# Altium PCB Intelligent_Agriculture.PcbDoc
Units mil, origin at the board's own origin, x right, y up, seen from the top; angles counter-clockwise.
Board outline 3925 x 3925 mil, 2 copper layers (Top Layer, Bottom Layer); 87 components, 58 nets, 325 pads, 59 vias.
Unrouted connection lines stored in the file: 3.
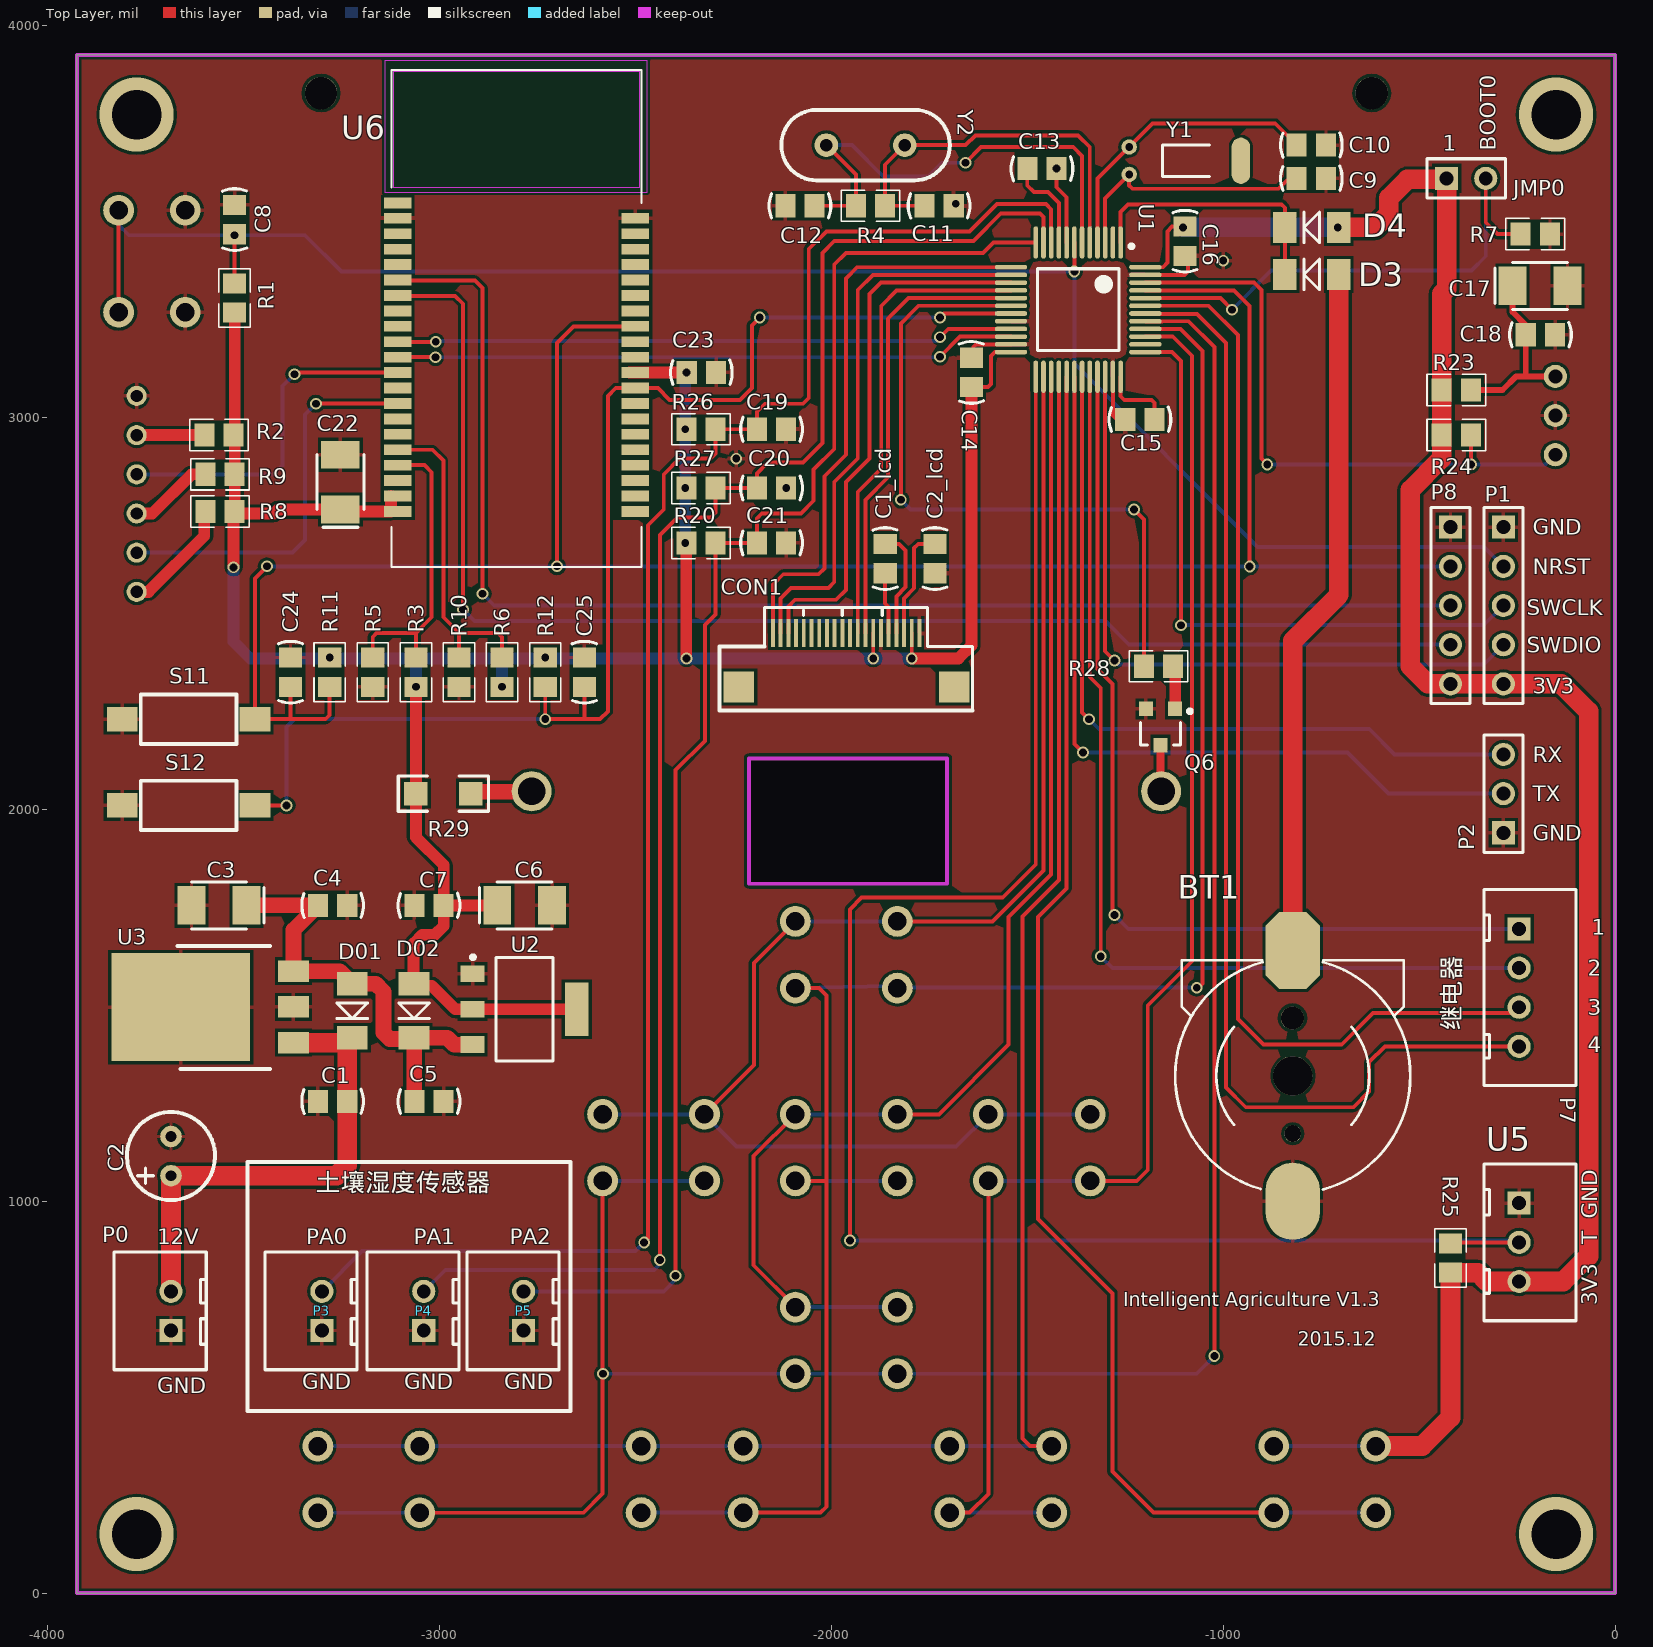
[diagram p0: Top Layer view]
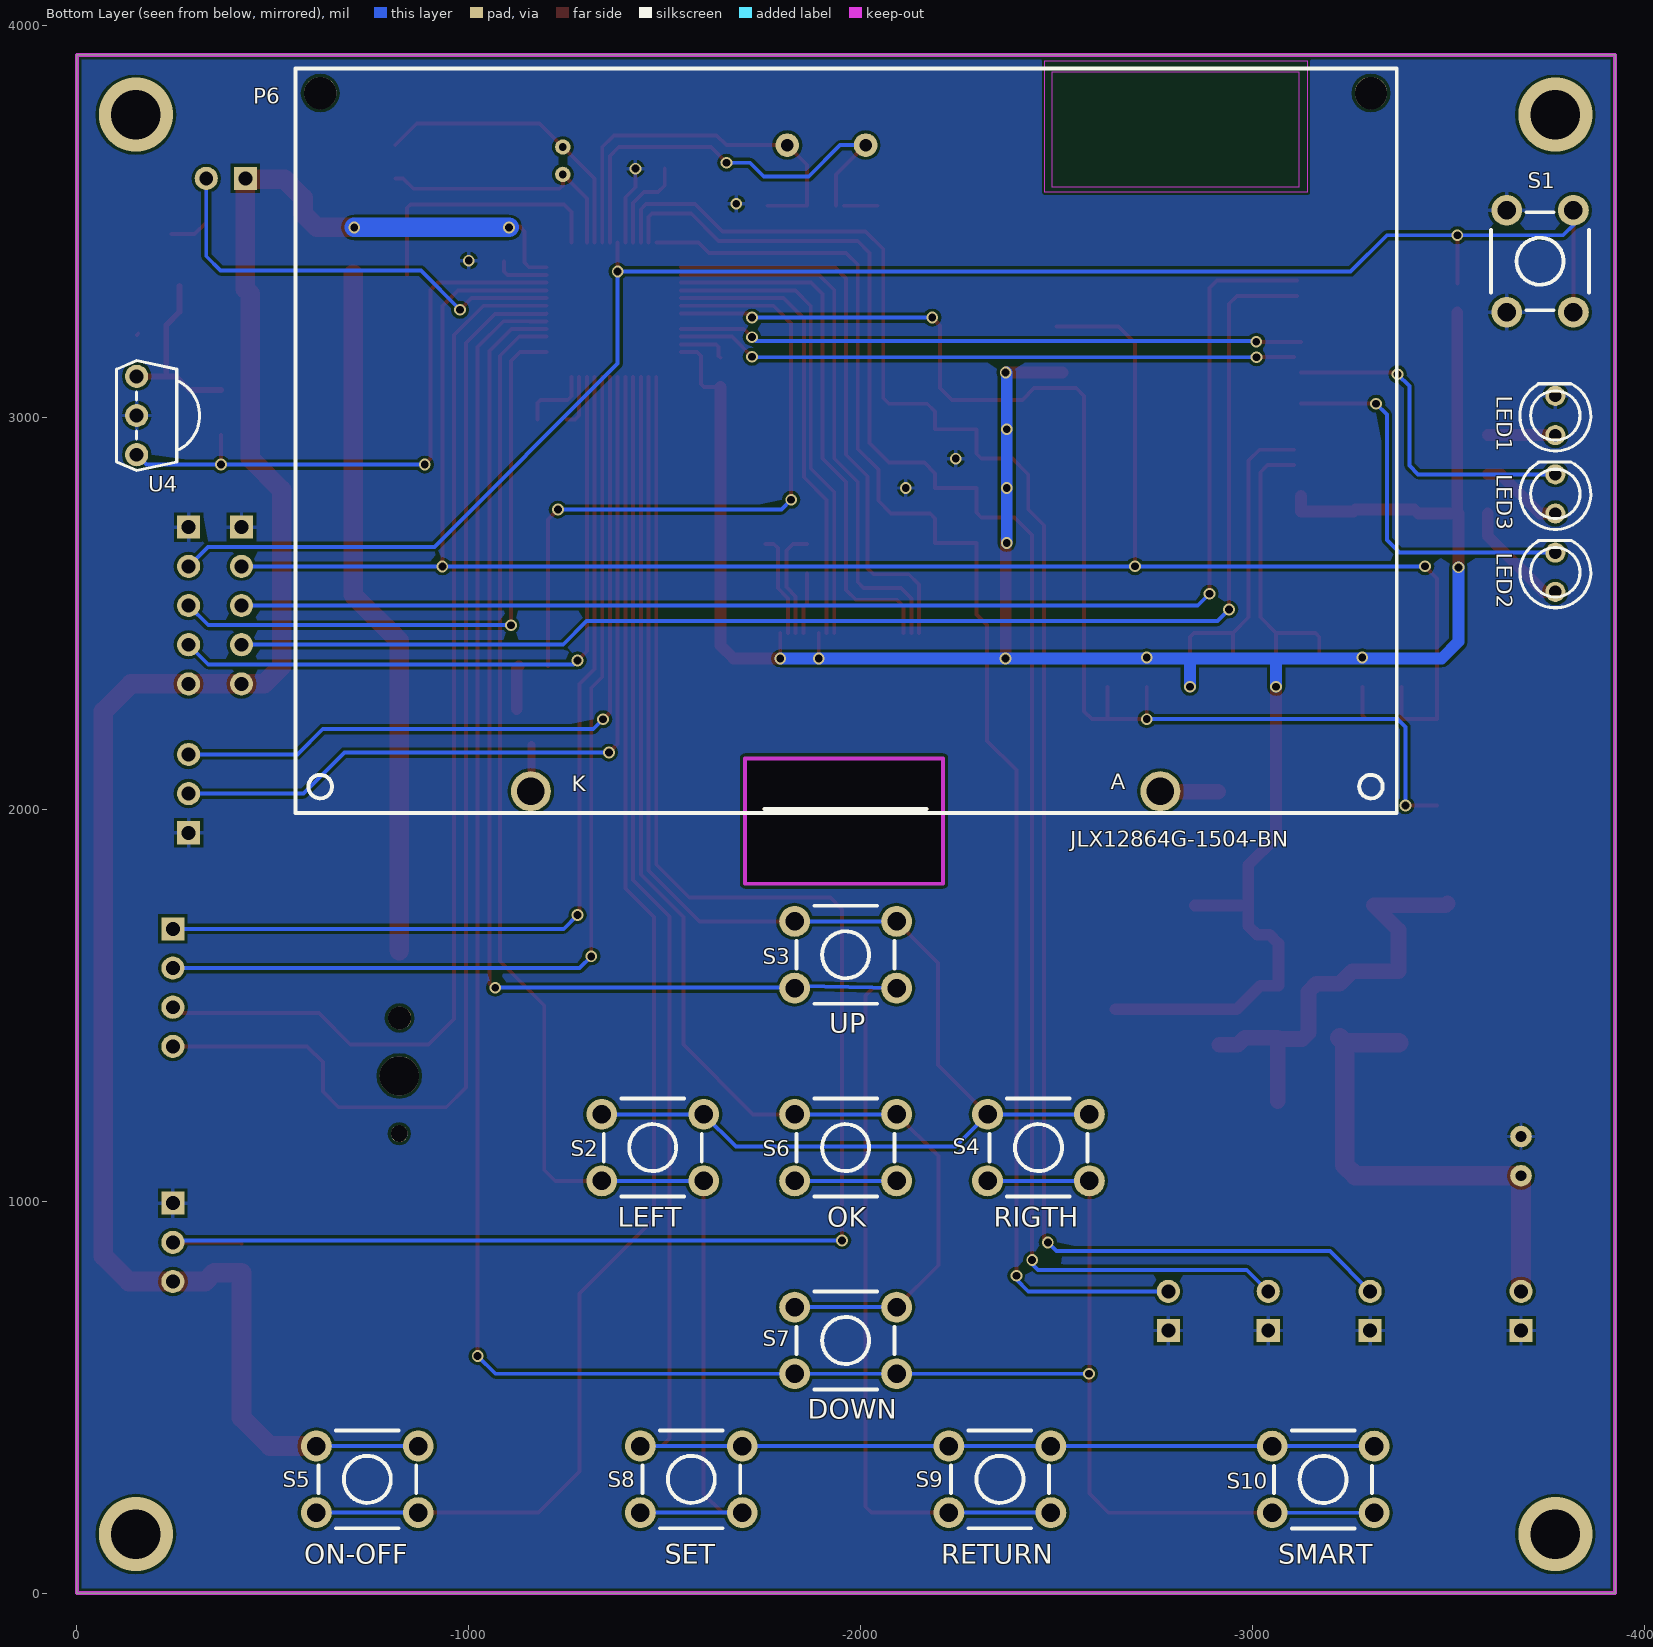
[diagram p1: Bottom Layer view, seen from below]

## Layer stack, top to bottom
Top Layer: signal copper 1.4
Dielectric: dielectric 12.6, FR-4, Dk 4.8
Bottom Layer: signal copper 1.4

## Board outline
-3925,0 -3925,3925 0,3925 0,0
cut-out: -1705,2130 -2210,2130 -2210,1810 -1705,1810

## Design rules (kind name [scope] priority, off if disabled: settings)
Clearance [All] p1: gap=7.5
HoleSize [All] p1: absolutevalues=TRUE maxlimit=200 minlimit=1 maxpercent=80.000 minpercent=20.000
PolygonConnect [All] p1: connectstyle=Relief reliefconductorwidth=10 reliefentries=4 polygonreliefangle="90 Angle"
RoutingVias [All] p1: holewidth=28 width=50 viastyle="Through Hole" minholewidth=28 minwidth=50 maxholewidth=28 maxwidth=50
SMDNeckDown [All] p1: percent=120.000
SilkscreenOverComponentPads SilkToSolderMaskClearance [IsPad] p1: minsilkscreentomaskgap=10
SolderMaskExpansion [All] p1: expansion=4
Width [All] p1: maxlimit=50 minlimit=8 preferedwidth=20
26 further rules are at their usual default settings.

## Classes and differential pairs
component class U_Intelligent_Agriculture: BT1 C1 C1_lcd C2 C2_lcd C3 C4 C5 C6 C7 C8 C9 C10 C11 C12 C13 C14 C15 C16 C17 C18 C19 C20 C21 CON1 D01 D02 D3 D4 JMP0 LED1 P0 P1 P2 P3 P4 P5 P6 P7 Q6 R1 R2 R4 R7 R20 R23 R24 R25 R26 R27 R28 R29 S1 S2 S3 S4 S5 S6 S7 S8 S9 S10 U1 U2 U3 U4 U5 Y1 Y2
component class U_Intelligent_Agriculture_Wifi: C22 C23 C24 C25 LED2 LED3 P8 R3 R5 R6 R8 R9 R10 R11 R12 S11 S12 U6

## Components (designator, comment, footprint, x,y, rotation, side; value= is the part's Value field where it differs from the comment)
BT1 "Battery" CR1220 -822.52,1319.8 r180 top
C1 "Cap" C-RAD-0805 -3272.52,1254.8 r180 top
C1_lcd "Cap" C-RAD-0805 -1862.52,2639.8 r90 top
C2 "Cap Pol1" C-RB-2.54 -3685,1115 r90 top
C2_lcd "Cap" C-RAD-0805 -1735.52,2639.8 r270 top
C3 "Cap Pol" CAP-3528 -3562.52,1754.8 r180 top
C4 "Cap" C-RAD-0805 -3272.52,1754.8 r0 top
C5 "Cap" C-RAD-0805 -3026.55,1254.8 r0 top
C6 "Cap Pol" CAP-3528 -2782.52,1754.8 r0 top
C7 "Cap" C-RAD-0805 -3026.55,1754.8 r180 top
C8 "Cap" C-RAD-0805 -3522.52,3504.8 r270 top
C9 "Cap" C-RAD-0805 -775,3610 r0 top
C10 "Cap" C-RAD-0805 -775,3695 r0 top
C11 "Cap" C-RAD-0805 -1725,3540 r0 top
C12 "Cap" C-RAD-0805 -2080,3540 r180 top
C13 "Cap" C-RAD-0805 -1462.52,3634.8 r0 top
C14 "Cap" C-RAD-0805 -1642.52,3114.8 r90 top
C15 "Cap" C-RAD-0805 -1212.52,2994.8 r180 top
C16 "Cap" C-RAD-0805 -1097.52,3449.8 r270 top
C17 "Cap Pol" CAP-3528 -191.52,3335.8 r0 top
C18 "Cap" C-RAD-0805 -190.52,3210.8 r0 top
C19 "Cap" C-RAD-0805 -2152.52,2969.8 r180 top
C20 "Cap" C-RAD-0805 -2152.52,2819.8 r180 top
C21 "Cap" C-RAD-0805 -2152.52,2679.8 r180 top
C22 "Cap Pol" CAP-3528 -3252.52,2834.8 r90 top
C23 "Cap" C-RAD-0805 -2331.52,3114.8 r180 top
C24 "Cap" C-RAD-0805 -3380,2350 r90 top
C25 "Cap" C-RAD-0805 -2630,2350 r90 top
CON1 "LCD_CON20" FPC0.5-20P-A -2200,2380 r180 top
D01 "Diode" DIODE-1206 -3222.52,1554.8 r270 top
D02 "Diode" DIODE-1206 -3064.52,1554.8 r270 top
D3 "Diode" DIODE-1206 -705,3365 r180 top
D4 "Diode" DIODE-1206 -705,3485 r180 top
JMP0 "Header 2" HDR2X1_A -430,3610 r0 top
LED1 "LED0" LED_A2 -3772.52,3004.8 r270 bottom
LED2 "LED0" LED_A2 -3772.52,2604.8 r270 bottom
LED3 "LED0" LED_A2 -3772.52,2804.8 r270 bottom
P0 "Header 2" HDR2X1_B1 -3685,670 r90 top
P1 "Header 5" HDR5_A1 -285,2720 r270 top
P2 "Header 3" HDR3X1_A -285,1940 r90 top
P3 "Header 2" HDR2X1_B1 -3300,670 r90 top
P4 "Header 2" HDR2X1_B1 -3040,670 r90 top
P5 "Header 2" HDR2X1_B1 -2785,670 r90 top
P6 "LCDLEDAK" LCD_JLX12864G-1504 -557.95,3890.63 r180 bottom
P7 "Header 4" HDR4X1_B1 -245,1695 r270 top
P8 "Header 5" HDR5_A1 -420,2720 r270 top
Q6 "S8050" SOT-23 -1160,2210 r180 top
R1 "Res1" 0805-1 -3522.52,3304.8 r270 top
R2 "Res1" 0805-1 -3562.52,2954.8 r0 top
R3 "Res1" 0805-1 -3060,2350 r270 top
R4 "Res1" 0805-1 -1900,3540 r0 top
R5 "Res1" 0805-1 -3170,2350 r270 top
R6 "Res1" 0805-1 -2840,2350 r270 top
R7 "Res1" 0805-1 -203.52,3467.8 r0 top
R8 "Res1" 0805-1 -3560,2760 r0 top
R9 "Res1" 0805-1 -3560,2854.8 r0 top
R10 "Res1" 0805-1 -2950,2350 r270 top
R11 "Res1" 0805-1 -3280,2350 r270 top
R12 "Res1" 0805-1 -2730,2350 r90 top
R20 "Res1" 0805-1 -2332.52,2679.8 r180 top
R23 "Res1" 0805-1 -405,3070 r0 top
R24 "Res1" 0805-1 -405,2955 r0 top
R25 "Res1" 0805-1 -420,855 r270 top
R26 "Res1" 0805-1 -2332.52,2969.8 r180 top
R27 "Res1" 0805-1 -2332.52,2819.8 r180 top
R28 "Res1" 0805-1 -1165,2365 r180 top
R29 "Res1" 1206 -2990,2040 r180 top
S1 "SW-PB4" SW_PB4_B1 -3733.54,3398.5 r90 bottom
S2 "SW-LEFT" SW_PB4_B1 -1469.37,1136.73 r180 bottom
S3 "SW-UP" SW_PB4_B1 -1961.5,1628.86 r180 bottom
S4 "SW-RIGHT" SW_PB4_B1 -2453.62,1136.73 r180 bottom
S5 "SW-WAIT" SW_PB4_B1 -741.02,290.28 r180 bottom
S6 "SW-OK" SW_PB4_B1 -1961.5,1136.73 r180 bottom
S7 "SW-DOWN" SW_PB4_B1 -1961.5,644.61 r180 bottom
S8 "SW-SET" SW_PB4_B1 -1567.8,290.28 r180 bottom
S9 "SW-ESC" SW_PB4_B1 -2355.2,290.28 r180 bottom
S10 "SW-SMART" SW_PB4_B1 -3180,290 r180 bottom
S11 "SW-PB2" SW_PB2-S-3*6*2.5 -3640,2230 r0 top
S12 "SW-PB2" SW_PB2-S-3*6*2.5 -3640,2010 r0 top
U1 "STM32F103C" LQFP-48_M -1370,3275 r270 top
U2 "AMS1117-3.3" SOT-223 -2782.52,1489.8 r270 top
U3 "LM78M05" TO-252 -3372.52,1404.8 r90 top
U4 "HS0038B" HS0038B -152.48,3004.8 r90 bottom
U5 "DS18B20" HDR3X1_B1 -245,995 r270 top
U6 "EMW3165" EMW3165 -2500,2760 r90 top
Y1 "XTAL_SM" X-TC15_B -1255,3655 r90 top
Y2 "XTAL" X-HC49U -1912.52,3694.8 r0 top

## Footprints (in the part's own frame and the unit in brackets; to place one, negate y for a bottom-side part, rotate by r counter-clockwise, add the part's x,y. Pads: shape width x height; smd on the part's side, far side on the other; paste and mask are expansions set on the pad)
0805-1 [mm]
  rect 1.3x1.5 smd: 1(-0.95,0) 2(0.95,0)
  silkscreen extent -1.91,-1.02 1.91,1.02, body extent -1.14,-0.51 1.14,0.51, height 1
1206 [mil]
  rect 60x60 smd: 1(-70,0) 2(70,0)
  silkscreen extent -115,-45 115,45, body extent -75,-35 75,35, height 39
C-RAD-0805 [mm]
  rect 1.3x1.5 smd: 1(-0.95,0) 2(0.95,0)
  silkscreen extent -2,-0.79 2,0.79, body extent -1.27,-0.64 1.27,0.64, height 0.9
C-RB-2.54 [mm]
  round 1.4 hole 0.7: 1(-1.27,0) 2(1.27,0)
  silkscreen extent -2.85,-2.85 2.85,2.85
CAP-3528 [mm]
  rect 1.8x2.5 smd: 1(-1.778,0) 2(1.778,0)
  silkscreen extent -2.92,-1.52 1.78,1.52, body extent -1.91,-1.4 1.91,1.4, height 1.1
CR1220 [mm]
  round 1.1 hole 1.1: 0(0,3.75)
  round 2.54 hole 2.54: 0(0,0)
  round 1.5 hole 1.5: 0(0.025,-3.75)
  oct 3.5x5 smd: 1(0,-8.128)
  oval 3.5x5 smd: 2(0,8.128)
  silkscreen extent -7.62,-7.5 7.62,7.36
DIODE-1206 [mm]
  rect 1.5x2 smd: 1(0,0) 2(3.5,0)
  silkscreen extent 1.25,-1 2.25,1
EMW3165 [mm] "EMW365 wif"
  rect 0.7x1.8 smd: 1(0,0) 2(1,0) 3(2,0) 4(3,0) 5(4,0) 6(5,0) 7(6,0) 8(7,0) 9(8,0) 10(9,0) 11(10,0) 12(11,0) 13(12,0) 14(13,0) 15(14,0) 16(15,0) 17(16,0) 18(17,0) 19(18,0) 20(19,0) 21(19,15.4) 22(18,15.4) 23(17,15.4) 24(16,15.4) 25(15,15.4) 26(14,15.4) 27(13,15.4) 28(12,15.4) 29(11,15.4) 30(10,15.4) 31(9,15.4) 32(8,15.4) 33(7,15.4) 34(6,15.4) 35(5,15.4) 36(4,15.4) 37(3,15.4) 38(2,15.4) 39(1,15.4) 40(0,15.4) 41(20,15.4)
  Keep-Out Layer region: 21,-0.3 28.5,-0.3 28.5,15.7 21,15.7
  silkscreen extent -3.6,-0.4 28.6,15.8
FPC0.5-20P-A [mm]
  rect 0.25x1.8 smd: 1(-1.296,-1.767) 2(-1.796,-1.767) 3(-2.296,-1.767) 4(-2.796,-1.767) 5(-3.296,-1.767) 6(-3.796,-1.767) 7(-4.296,-1.767) 8(-4.796,-1.767) 9(-5.296,-1.767) 10(-5.796,-1.767) 11(-6.296,-1.767) 12(-6.796,-1.767) 13(-7.296,-1.767) 14(-7.796,-1.767) 15(-8.296,-1.767) 16(-8.796,-1.767) 17(-9.296,-1.767) 18(-9.796,-1.767) 19(-10.296,-1.767) 20(-10.796,-1.767)
  rect 2x2 smd: A(-13.045,1.722) B(0.922,1.722)
  silkscreen extent -14.22,-3.43 2.16,3.26
HDR2X1_A [mm] "Conn"
  rect 1.5x1.5 hole 0.9: 1(0,0)
  round 1.5 hole 0.9: 2(2.54,0)
  silkscreen extent -1.27,-1.27 3.81,1.27
HDR2X1_B1 [mm] "Conn"
  rect 1.5x1.5 hole 0.9: 1(0,0)
  round 1.5 hole 0.9: 2(2.54,0)
  silkscreen extent -2.54,-2.29 5.08,3.68, body extent -2.41,-2.16 5.08,3.56, height 1.5
HDR3X1_A [mm] "Conn"
  rect 1.5x1.5 hole 0.9: 1(0,0)
  round 1.5 hole 0.9: 2(2.54,0) 3(5.08,0)
  silkscreen extent -1.27,-1.27 6.35,1.27
HDR3X1_B1 [mm]
  rect 1.5x1.5 hole 0.9: 1(0,0)
  round 1.5 hole 0.9: 2(2.54,0) 3(5.08,0)
  silkscreen extent -2.54,-2.29 7.62,3.68, body extent -2.54,-2.29 7.62,3.68, height 1.5
HDR4X1_B1 [mm] "Conn"
  rect 1.5x1.5 hole 0.9: 1(0,0)
  round 1.5 hole 0.9: 2(2.54,0) 3(5.08,0) 4(7.62,0)
  silkscreen extent -2.54,-2.29 10.16,3.68, body extent -2.41,-2.16 10.03,3.56, height 1.5
HDR5_A1 [mm] "Connec"
  rect 1.5x1.5 hole 0.9: 1(0,0)
  round 1.5 hole 0.9: 2(2.54,0) 3(5.08,0) 4(7.62,0) 5(10.16,0)
  silkscreen extent -1.27,-1.27 11.43,1.27
HS0038B [mm]
  round 1.5 hole 0.9: 1(-2.54,0) 2(0,0) 3(2.54,0)
  silkscreen extent -3.56,-4.08 3.56,1.3
LCD_JLX12864G-1504 [mm]
  round 2.6 hole 1.8: 1(56.05,-46.85) 2(15.25,-46.85)
  round 2.1 hole 2.1: 3(1.6,-1.6) 4(69.7,-1.6)
  silkscreen extent 0,-48.26 71.37,0
LED_A2 [mm]
  round 1.3 hole 0.8: 1(1.27,0) 2(-1.27,0)
  silkscreen extent -2.06,-2.3 2.3,2.3
LQFP-48_M [mm] "Thin QFP, 4"
  oval 2.1x0.3 smd: 1(-4.354,2.75) 2(-4.354,2.25) 3(-4.354,1.75) 4(-4.354,1.25) 5(-4.354,0.75) 6(-4.354,0.25) 7(-4.354,-0.25) 8(-4.354,-0.75) 9(-4.354,-1.25) 10(-4.354,-1.75) 11(-4.354,-2.25) 12(-4.354,-2.75) 25(4.354,-2.75) 26(4.354,-2.25) 27(4.354,-1.75) 28(4.354,-1.25) 29(4.354,-0.75) 30(4.354,-0.25) 31(4.354,0.25) 32(4.354,0.75) 33(4.354,1.25) 34(4.354,1.75) 35(4.354,2.25) 36(4.354,2.75)
  oval 0.3x2.1 smd: 13(-2.75,-4.354) 14(-2.25,-4.354) 15(-1.75,-4.354) 16(-1.25,-4.354) 17(-0.75,-4.354) 18(-0.25,-4.354) 19(0.25,-4.354) 20(0.75,-4.354) 21(1.25,-4.354) 22(1.75,-4.354) 23(2.25,-4.354) 24(2.75,-4.354) 37(2.75,4.354) 38(2.25,4.354) 39(1.75,4.354) 40(1.25,4.354) 41(0.75,4.354) 42(0.25,4.354) 43(-0.25,4.354) 44(-0.75,4.354) 45(-1.25,4.354) 46(-1.75,4.354) 47(-2.25,4.354) 48(-2.75,4.354)
  silkscreen extent -4.22,-2.65 2.65,3.57, body extent -3.5,-3.5 3.5,3.5, height 1.6
SOT-23 [mm]
  rect 0.9x0.95 smd: 1(-0.95,-1.175) 2(0.95,-1.175) 3(0,1.175)
  silkscreen extent -2.03,-1.14 1.3,1.18
SOT-223 [mm]
  rect 1.1x1.55 smd: 1(-2.3,-3.375) 2(0,-3.375) 3(2.3,-3.375)
  rect 3.45x1.55 smd: 4(0,3.375)
  silkscreen extent -3.5,-3.48 3.35,1.85, body extent -3.3,-3.94 3.3,3.43, height 0.8
SW_PB2-S-3*6*2.5 [mm]
  rect 2x1.6 smd: 1(-4.3,0) 2(4.3,0)
  silkscreen extent -3.1,-1.6 3.1,1.6
SW_PB4_B1 [mm]
  round 2 hole 1.2: 1(-3.302,2.159) 2(-3.302,-2.159) 3(3.302,-2.159) 4(3.302,2.159)
  silkscreen extent -3.17,-3.17 3.17,3.17, body extent -3.18,-3.18 3.18,3.18, height 6
TO-252 [mm]
  rect 1.4x2 smd: 1(0,0) 2(2.311,0) 3(4.623,0)
  rect 7x9 smd: 4(2.3,7.3)
  silkscreen extent -1.72,1.52 6.26,7.51
X-HC49U [mil]
  round 60 hole 32: 1(-100,0) 2(100,0)
  silkscreen extent -215,-90 215,90
X-TC15_B [mm]
  round 1 hole 0.5: 1(-0.889,-0.381) 2(0.889,-0.381)
  oval 3x1.2 smd: 3(0,-7.62)
  silkscreen extent -1.02,-5.59 1.02,-2.54, body extent -1,-8.29 1,0, height 1.99

## Part data
BT1: "±¸·Ýµ"
C1 C1_lcd C2_lcd C4 C5 C7 C8 C9 C10 C11 C12 C13 C14 C15 C16 C18 C19 C20 C21 C23 C24 C25: "无极性"
C2: "µç½âµ"
C3 C6 C17 C22: "钽电"
CON1: library part LCD, "LCD接插"
D01 D02 D3 D4: "二极"
JMP0 P0 P1 P2 P3 P4 P5 P7: library part He, "接插件"
LED1 LED2 LED3: "发光二"
P6: library part LCDLE, "LCD12864¿ò¼"
P8: library part Header, "接插"
Q6: library part BCP68, "NPN三极"
R1 R2 R3 R4 R5 R6 R7 R8 R9 R10 R11 R12 R20 R23 R24 R25 R26 R27 R28 R29: library part R, "ÌùÆ¬µ"
S1 S2 S3 S4 S5 S6 S7 S8 S9 S10: library part SW-, "Î¢¶¯¿"
S11 S12: "Î¢¶¯¿"
U1: "STM32单片机48引脚"
U2: library part SPX1, "3.3VÎÈÑ¹Ð"
U3: "5VÎÈÑ¹Ð"
U4: library part HS0, "红外接"
U5: library part DS1, "温度传"
U6: library part E, "WIFI 模块"
Y1: "Ô²Öù¾"
Y2: library part X, "¾§Õ"

## Free pads (board coordinates)
  round 188.98 hole 125.98: 0(-150.47,3772.52) 1(-3772.52,3772.52) 2(-3772.52,150.47) 3(-150.47,150.47)

## Via types
v1: diameter 30, hole 20, Top Layer to Bottom Layer, tented both sides, 55 vias
v2: diameter 188.98, hole 125.98, Top Layer to Bottom Layer, tented both sides, 4 vias

## Nets (pads, with @x,y where several pads share a name; then routed paths per layer and width w, separated by ;. In a path a pad name is that pad's centre, name@x,y a point inside that pad or via, vN(x,y) a via of type N, cw(c..) or ccw(c..) an arc to the next point about the centre after c; other vN are vias at no path point)
BOOT: R6.1 R10.1 U6.36 | length 813.6
  Top Layer w10: U6.36 -3017.48,2917.48 -2990,2890 -2990,2490 -2950,2450 ; R10.1 -2950,2450 ; R6.1 -2840,2440 -2850,2450 -2950,2450
BOOT0: JMP0.2 R7.1 U1.44 | length 1350.1
  Top Layer w10: U1.44 -1007.24,3304.53 v1(-977.52,3274.8) ; JMP0.2 -330,3497.28 -300.52,3467.8 R7.1
  Bottom Layer w10: v1(-977.52,3274.8) -877.52,3374.8 -366.52,3374.8 -330,3411.32 JMP0.2
E_LINK: C25.1 R12.1 S12.2 U1.19 U6.9 | length 3325.7
  Top Layer w10: S12.2 v1(-3390,2010) ; R12.1 v1(-2730,2230) -2630,2230 ; C25.1 -2630,2230 ; v1(-2182.52,3254.8) -2202.52,3234.8 -2202.52,3074.8 -2232.52,3044.8 -2412.52,3044.8 -2442.48,3074.76 -2550,3074.76 -2570,3054.76 -2570,2250 -2590,2230 -2630,2230 ; v1(-1722.52,3254.8) -1712.17,3265.16 U1.19
  Bottom Layer w10: v1@-3400,2010 -3390,2020 -3390,2210 -3370,2230 v1(-2730,2230) ; v1(-2182.52,3254.8) v1(-1722.52,3254.8)
E_RST: C24.1 P8.2 R11.2 S11.2 U1.45 U6.13 | length 5507.7
  Top Layer w10: v1(-3440,2620) -3470.71,2589.29 S11.2 -3380,2230 ; C24.1 -3380,2230 ; R11.2 -3280,2240 -3290,2230 -3380,2230 ; v1(-2700,2620) -2700,3190 -2657.56,3232.44 U6.13 ; U1.45 -971.93,3324.21 -932.52,3284.8 v1(-932.52,2619.8)
  Bottom Layer w10: v1(-3440,2620) v1(-2700,2620) P8.2
GND: BT1.2 C1.2 C2.2 C2_lcd.2 C3.2 C4.2 C5.2 C6.2 C7.2 C8.1 C9.2 C10.2 C11.2 C12.2 C13.2 C14.2 C15.2 C16.2 C17.2 C18.2 C19.1 C20.1 C21.1 C22.2 C23.1 C24.2 C25.2 CON1.15 CON1.20 LED1.2 P0.1 P1.1 P2.1 P3.1 P4.1 P5.1 P8.1 Q6.2 R5.2 R7.2 R10.2 S1.1 S1.4 S11.1 S12.1 U1.8 U1.20 U1.23 U1.35 U1.47 U2.1 U3.2 U3.4 U4.2 U5.1 U6.20 U6.21 | length 604.2
  Top Layer w10: C14.2 -1637.52,3157.21 -1637.52,3179.8 -1630.91,3186.42 U1.23 ; v1(-1425.12,3634.8) -1425.12,3587.4 -1399.53,3561.81 U1.8 ; U1.35 -1281.42,3004.8 -1271.42,2994.8 C15.2 ; U1.47 -1098.74,3363.58 -1090,3372.32 C16.2@-1090,3397.6 ; C18.2@-156.52,3214.21 C18.2
  other v1: -2115.12,2819.8 -2242.52,2894.8 -1000,3400 -1682.6,3545
KEY_I1: S2.1 S2.4 S3.1 S3.4 S4.1 S4.4 U1.26 | length 3847
  Top Layer w10: S4.1 -2197.52,1347.83 -2197.52,1607.83 S3.4 ; S3.1 -1588.46,1713.86 -1458.58,1843.74 U1.26
  Bottom Layer w10: S4.4 S4.1 -2241.69,1139.8 -1681.3,1139.8 S2.4 S2.1 ; S3.4 S3.1
KEY_I2: S6.1 S6.4 S7.1 S7.4 U1.27 | length 3207.2
  Top Layer w10: S7.4 -2198.43,836.54 -2198.43,1114.8 S6.4 ; S6.1 -1725.59,1221.73 -1547.52,1399.8 -1547.52,1724.8 -1438.9,1833.43 U1.27
  Bottom Layer w10: S7.4 S7.1 ; S6.4 S6.1
KEY_I3: S8.1 S8.4 S9.1 S9.4 S10.1 S10.4 U1.28 | length 4702.4
  Top Layer w10: S8.1@-1438.07,375 -1492.72,375 -1512.52,394.8 -1512.52,1726.5 -1419.21,1819.8 U1.28
  Bottom Layer w10: S10.4 S10.1 -1438.07,375 S8.1
KEY_O1: S2.2 S2.3 S8.2 S8.3 U1.39 | length 3858.3
  Top Layer w10: S8.3 -1647.05,205.28 -1599.37,252.95 S2.3 ; S2.2 -1220.59,1051.73 -1192.52,1079.8 -1192.52,1499.8 -1080.02,1612.3 -1080.02,3157.3 -1128.82,3206.1 U1.39
  Bottom Layer w10: S8.3 S8.2 ; S2.3 S2.2
KEY_O2: S3.2 S3.3 S6.2 S6.3 S9.2 S9.3 U1.40 | length 5015.8
  Top Layer w10: S9.2 -2027.52,205.28 -2012.52,220.28 -2012.52,1051.73 ; S6.3 -2012.52,1051.73 ; S3.3 -2031.54,1543.86 -2012.52,1524.84 -2012.52,1051.73 ; U1.40 -1108.5,3225.79 -1052.52,3169.8 -1052.52,1554.8 v1@-1062.52,1544.8
  Bottom Layer w10: S9.3 S9.2 ; S6.3 S6.2 ; S3.3 S3.2@-1846.5,1548.86 ; S3.2@-1830.55,1544.8 v1(-1067.52,1544.8)
KEY_O3: S4.2 S4.3 S7.2 S7.3 S10.2 S10.3 U1.41 | length 6204.8
  Top Layer w10: S10.2 -2632.52,205 -2583.62,253.9 S4.3 ; -1155.53,3244.19 -1197.3,3244.19 U1.41 -1088.19,3245.47 -1022.52,3179.8 v1(-1022.52,604.8)
  Bottom Layer w10: S10.3 S10.2 ; S4.3 S4.2 ; v1(-2582.32,559.61) S7.3 S7.2 -1067.72,559.61 v1(-1022.52,604.8)
KEY_WAIT: S5.2 S5.3 U1.29 | length 3617.5
  Top Layer w10: U1.29 -1399.53,1797.8 -1472.52,1724.8 -1472.52,954.8 -1282.52,764.8 -1282.52,309.8 -1177.99,205.28 S5.3
  Bottom Layer w10: S5.3 S5.2
LCD_CS: CON1.1 U1.13 | length 1468.1
  Top Layer w10: CON1.1 -2148.96,2573.36 -2122.52,2599.8 -2032.52,2599.8 -2017.52,2614.8 -2017.52,2849.8 -1962.52,2904.8 -1962.52,3354.8 -1934.06,3383.27 U1.13
LCD_LED: R28.2 U1.18 | length 1765.3
  Top Layer w10: v1(-1822.52,2789.8) -1822.52,3239.8 -1777.48,3284.84 U1.18 ; v1(-1227.52,2764.8) -1202.4,2739.68 -1202.4,2734.68 R28.2
  Bottom Layer w10: v1(-1822.52,2789.8) -1797.52,2764.8 v1(-1227.52,2764.8)
LCD_RS: CON1.3 U1.15 | length 1385.7
  Top Layer w10: CON1.3 -2109.59,2517.73 -2092.52,2534.8 -1987.52,2534.8 -1962.52,2559.8 -1962.52,2834.8 -1902.52,2894.8 -1902.52,3314.8 -1873.43,3343.9 U1.15
LCD_RST: CON1.2 U1.14 | length 1419.6
  Top Layer w10: CON1.2 -2129.27,2538.05 -2102.52,2564.8 -2007.52,2564.8 -1992.52,2579.8 -1992.52,2834.8 -1932.52,2894.8 -1932.52,3324.8 -1893.74,3363.58 U1.14
LCD_SCK: CON1.12 U1.16 | length 1207.5
  Top Layer w10: CON1.12 -1932.42,2809.9 -1872.52,2869.8 -1872.52,3284.8 -1833.11,3324.21 U1.16
LCD_SDA: CON1.13 U1.17 | length 1161.9
  Top Layer w10: CON1.13 -1912.74,2789.58 -1855.02,2847.3 -1855.02,3252.3 -1802.8,3304.53 U1.17
NetBT1_1: BT1.1 D3.1 | length 1773.9
  Top Layer w50: BT1.1 -822.52,2429.8 -705,2547.32 D3.1
NetC1_lcd_1: C1_lcd.1 CON1.16 | length 156.5
  Top Layer w10: C1_lcd.1 -1862.52,2524.8 -1853.68,2515.97 CON1.16
NetC1_lcd_2: C1_lcd.2 CON1.17 | length 279.8
  Top Layer w10: C1_lcd.2 -1826.92,2677.21 -1810.52,2660.8 -1810.52,2566.8 -1834,2543.32 CON1.17
NetC2_lcd_1: C2_lcd.1 CON1.18 | length 263.2
  Top Layer w10: CON1.18 -1814.31,2538.26 -1788.52,2564.05 -1788.52,2666.8 -1778.12,2677.2 C2_lcd.1@-1757.52,2677.2
NetC17_1: C17.1 C18.1 R23.2 U4.3 | length 474.8
  Top Layer w15: R23.2 -287.32,3070 -252.52,3104.8 -227.52,3104.8 ; C17.1 -261.52,3268.8 -227.92,3235.21 C18.1 -227.92,3105.21 -227.52,3104.8 ; U4.3@-152.6,3104.92 U4.3 -227.52,3104.8
NetLED1_1: LED1.1 R2.1 | length 177.6
  Top Layer w10: R2.1 R2.1@-3594.92,2954.8
  Top Layer w30: LED1.1 R2.1
NetLED2_1: LED2.1 R8.1 | length 289.1
  Top Layer w30: LED2.1 -3742.52,2554.8 -3599.92,2697.4 R8.1@-3599.92,2754.8
NetLED2_2: LED2.2 U6.33 | length 993.8
  Top Layer w10: v1(-3315.2,3034.8) -3314.61,3035.39 U6.33@-3123.82,3035.39
  Bottom Layer w10: LED2.2 -3375.2,2654.8 -3342.52,2687.48 -3342.52,3007.48 v1(-3315.2,3034.8)
NetLED3_1: LED3.1 R9.1 | length 214
  Top Layer w30: LED3.1 -3732.52,2754.8 -3632.52,2854.8 R9.1@-3599.92,2854.8
NetLED3_2: LED3.2 U6.31 | length 874.8
  Top Layer w10: v1(-3370,3110) -3365.87,3114.13 U6.31@-3123.82,3114.13
  Bottom Layer w10: LED3.2 -3422.52,2854.8 -3400,2877.32 -3400,3080 v1(-3370,3110)
NetP6_1: P6.1 R29.1 | length 153.1
  Top Layer w30: P6.1 P6.1@-2760,2050.79
  Top Layer w40: R29.1@-2912.52,2044.8 P6.1@-2765.98,2044.8
NetP6_2: P6.2 Q6.3 | length 118.3
  Top Layer w20: Q6.3 -1160,2047.8 P6.2
NetP8_3: P8.3 U6.25 | length 3493.8
  Top Layer w10: U6.25@-3113.3,3349.55 -2909.55,3349.55 -2890,3330 v1(-2890,2550)
  Bottom Layer w10: v1(-2890,2550) -2860,2520 P8.3
NetP8_4: P8.4 U6.26 | length 3518.9
  Top Layer w10: U6.26@-3113.3,3310.18 -2960.18,3310.18 -2940,3290 v1(-2940,2510)
  Bottom Layer w10: v1(-2940,2510) -2910,2480 -1300,2480 -1240,2420 P8.4
NetQ6_1: Q6.1 R28.1 | length 110.8
  Top Layer w30: R28.1 -1122.6,2360 Q6.1
NRST: C8.2 P1.2 R1.1 S1.2 S1.3 U1.7 | length 4528.9
  Top Layer w10: S1.2 S1.3 ; R1.1 v1(-3522.52,3464.8) C8.2 ; v1(-1379.84,3372.48) U1.7
  Bottom Layer w10: S1.3 -3818.54,3490.83 -3792.52,3464.8 v1(-3522.52,3464.8) -3342.52,3464.8 -3250.2,3372.48 v1(-1379.84,3372.48) -1379.84,3137.13 -912.52,2669.8 -334.8,2669.8 P1.2
OSC32_IN: C9.1 U1.3 Y1.1 | length 668.9
  Top Layer w10: U1.3 -1301.1,3558.9 Y1.1 -1240,3592.28 -1231.16,3583.44 -858.88,3583.44 -832.32,3610 C9.1
OSC32_OUT: C10.1 U1.4 Y1.2 | length 752.1
  Top Layer w10: U1.4 -1320.79,3609.21 Y1.2 -1180.2,3749.8 -867.21,3749.8 C10.1
OSC_IN: C11.1 R4.2 U1.5 Y2.2 | length 1014
  Top Layer w10: C11.1 R4.2 -1862.6,3644.72 Y2.2 -1657.52,3694.8 -1632.52,3719.8 -1370.47,3719.8 -1340.47,3689.8 U1.5
OSC_OUT: C12.1 R4.1 U1.6 Y2.1 | length 1227.7
  Top Layer w10: C12.1 R4.1@-1957.72,3540 ; Y2.1 -1937.4,3619.68 R4.1 ; v1(-1657.52,3649.8) -1617.52,3689.8 -1382.52,3689.8 -1360.16,3667.44 U1.6
  Bottom Layer w10: Y2.1 -1947.52,3694.8 -1867.52,3614.8 -1752.52,3614.8 -1717.52,3649.8 v1(-1657.52,3649.8) v1@-1647.52,3649.8
PA0: C19.2 P3.2 R26.1 U1.10 | length 4505.4
  Top Layer w10: v1(-2477.52,894.8) -2467.52,904.8 -2467.52,2724.8 -2427.52,2764.8 -2427.52,2854.8 -2387.52,2894.8 -2307.52,2894.8 -2295.12,2907.2 R26.1 C19.2 -2189.92,3014.8 -2169.92,3034.8 -2072.52,3034.8 -2057.52,3049.8 -2057.52,3429.8 -2012.52,3474.8 -1647.52,3474.8 -1577.52,3544.8 -1452.52,3544.8 -1438.9,3531.18 U1.10
  Bottom Layer w10: P3.2 -3197.52,872.48 -2499.84,872.48 v1(-2477.52,894.8)
PA1: C20.2 P4.2 R27.1 U1.11 | length 4210.9
  Top Layer w10: v1(-2437.52,849.8) -2437.52,2699.8 -2392.52,2744.8 -2307.52,2744.8 -2295.12,2757.2 R27.1 C20.2 -2189.92,2857.4 -2162.52,2884.8 -2072.52,2884.8 -2022.52,2934.8 -2022.52,3419.8 -1992.52,3449.8 -1637.52,3449.8 -1567.52,3519.8 -1467.52,3519.8 -1458.58,3510.87 U1.11
  Bottom Layer w10: P4.2 -2985.2,824.8 -2452.52,824.8 v1@-2437.52,839.8
PA2: C21.2 P5.2 R20.1 U1.12 | length 3805.6
  Top Layer w10: v1(-2397.52,809.8) -2397.52,2099.8 -2322.52,2174.8 -2322.52,2469.8 -2295.12,2497.2 R20.1 C21.2 -2189.92,2742.4 -2177.52,2754.8 -2077.52,2754.8 -2045.02,2787.3 -2045.02,2867.3 -1992.52,2919.8 -1992.52,3389.8 -1962.52,3419.8 -1612.52,3419.8 -1585.91,3446.42 U1.12
  Bottom Layer w10: P5.2 -2427.72,770 -2427.52,769.8 v1@-2397.52,799.8
RELAY1: P7.1 U1.33 | length 2438.4
  Top Layer w10: U1.33 -1320.79,2358.07 -1282.52,2319.8 -1282.52,1735.2 v1(-1277.52,1730.2)
  Bottom Layer w10: v1(-1277.52,1730.2) -1242.32,1695 P7.1
RELAY2: P7.2 U1.32 | length 2570.2
  Top Layer w10: U1.32 -1340.47,2337.76 -1312.52,2309.8 -1312.52,1834.8 v1(-1312.52,1624.8)
  Bottom Layer w10: v1(-1312.52,1624.8) -1282.72,1595 -247.72,1595 P7.2
RELAY3: P7.3 U1.43 | length 2796
  Top Layer w10: U1.43 -1037.56,3284.84 -962.52,3209.8 -962.52,1464.8 -897.52,1399.8 -697.52,1399.8 -617.52,1479.8 -260.2,1479.8 P7.3
RELAY4: P7.4 U1.42 | length 3013.7
  Top Layer w10: U1.42 -1197.3,3263.88 -1066.59,3263.88 -992.52,3189.8 -992.52,1289.8 -942.52,1239.8 -667.52,1239.8 -627.52,1279.8 -627.52,1354.8 -587.32,1395 P7.4
REMOTE: R24.2 U1.46 U4.1 | length 1575.8
  Top Layer w10: U1.46 -921.61,3343.9 -902.52,3324.8 -902.52,2894.8 v1(-887.52,2879.8) ; R24.2 -367.52,2954.92 v1(-367.52,2879.8)
  Bottom Layer w10: v1(-887.52,2879.8) v1(-367.52,2879.8) -177.48,2879.8 U4.1
RX1: P2.3 U1.31 | length 1975.8
  Top Layer w10: U1.31 -1360.16,2247.44 v1(-1342.52,2229.8)
  Bottom Layer w10: v1(-1342.52,2229.8) -1317.52,2204.8 -627.32,2204.8 -562.52,2140 P2.3
RX3: U1.22 U6.30 | length 1584.6
  Top Layer w10: U6.30 v1@-3010.2,3153.7 ; v1(-1722.52,3154.8) -1671.22,3206.1 U1.22
  Bottom Layer w10: v1(-3010,3153.5) v1@-1723.82,3153.5
STATUS: R3.1 R5.1 U6.37 | length 749.7
  Top Layer w10: R5.1 -3170,2440 -3160,2450 -3060,2450 ; U6.37 -3038.11,2878.11 -3020,2860 -3020,2490 -3060,2450 ; R3.1 -3060,2450
SWCLK: P1.3 U1.37 | length 1617.8
  Top Layer w10: U1.37 -1130.59,3166.73 -1107.52,3143.66 v1(-1107.52,2469.8)
  Bottom Layer w10: v1(-1107.52,2469.8) -335.2,2469.8 P1.3
SWDIO: P1.4 U1.34 | length 1751
  Top Layer w10: U1.34 -1301.1,2403.39 v1(-1277.52,2379.8)
  Bottom Layer w10: v1(-1277.52,2379.8) -1267.52,2369.8 -335.2,2369.8 P1.4
TEMPER: R25.1 U1.25 U5.2 | length 4489.9
  Top Layer w10: v1(-1952.52,899.8) -1952.52,1744.8 -1922.52,1774.8 -1562.52,1774.8 -1478.27,1859.06 U1.25 ; R25.1 -417.4,895 U5.2
  Bottom Layer w10: v1(-1952.52,899.8) U5.2@-249.8,899.8
TX1: P2.2 U1.30 | length 2084
  Top Layer w10: U1.30 -1379.84,2167.13 v1(-1357.52,2144.8)
  Bottom Layer w10: v1(-1357.52,2144.8) -682.52,2144.8 -577.72,2040 P2.2
TX3: U1.21 U6.29 | length 1596
  Top Layer w10: U6.29@-3123.82,3192.87 v1(-3009.45,3192.87) v1@-3007.52,3194.8 ; v1(-1722.52,3204.8) -1701.54,3225.79 U1.21
  Bottom Layer w10: v1@-3007.52,3194.8 -1732.52,3194.8 v1(-1722.52,3204.8)
VBAT: D3.2 D4.2 U1.1 | length 677.9
  Top Layer w10: U1.1 -1261.73,3524.02 -1242.52,3543.23 -850.94,3543.23 -842.8,3535.08 D4.2 D3.2
VCC3V3: C6.1 C7.1 C13.1 C14.1 C15.1 C16.1 C22.1 C23.2 CON1.14 CON1.19 D02.1 D4.1 JMP0.1 P1.5 P8.5 R1.2 R2.2 R3.2 R6.2 R8.2 R9.2 R11.1 R12.2 R20.2 R23.1 R24.1 R25.2 R26.2 R27.2 R29.2 S5.1 S5.4 U1.9 U1.24 U1.36 U1.48 U2.2 U2.4 U5.3 U6.10 U6.39 U6.40 | length 13311.3
  Top Layer w10: v1(-1893.05,2384.8) CON1.14 ; v1(-1794.63,2384.91) CON1.19 ; -1642.52,2914.8 -1637.52,2919.8 -1637.52,3077.4 -1599.92,3077.4 -1592.52,3084.8 -1592.52,3156.73 -1582.52,3166.73 U1.24 ; C13.1 -1499.92,3592.21 -1482.52,3574.8 -1447.03,3574.8 -1419.21,3546.99 U1.9 ; U1.36 -1261.73,3054.02 -1252.52,3044.8 -1182.52,3044.8 -1175.12,3037.4 C15.1 ; U1.48 -1154.06,3383.27 -1142.52,3394.8 -1142.52,3474.8 -1130.12,3487.21 C16.1 ; JMP0.1@-432.6,3607.4 JMP0.1 ; -82.52,1039.8 -82.52,1799.8
  Top Layer w30: v1(-3525.12,2617.4) R8.2@-3525.12,2754.8 ; R1.2 -3522.52,2754.8 -3422.52,2754.8 -3412.52,2764.8 -3262.52,2764.8 -3257.72,2760 U6.40@-3123.82,2760 ; U6.40@-3123.82,2759.8 U6.40@-3123.82,2760 ; U6.39@-3123.82,2799.17 U6.40@-3123.82,2760 ; v1(-3060,2312.6) R29.2 -3060,1928.68 -2989.14,1857.83 C7.1 ; C6.1 C7.1 ; U2.4 U2.2 -2959.52,1489.8 -3019.52,1549.8 -3065.85,1549.8 -3065.85,1657.57 -3043.52,1679.91 -3011.44,1679.91 -2989.14,1702.2 C7.1 ; U6.10@-2515,3114.33 U6.10 -2412.99,3114.33 -2412.52,3114.8 v1(-2369.92,3114.8) ; v1@-2369.92,2385.8 R20.2 R20.2@-2369.92,2685.8 ; v1(-1794.63,2384.91) -1675.41,2384.91 -1642.52,2417.8 -1642.52,2914.8 C14.1
  Top Layer w50: D4.1 -612.32,3485 -577.52,3519.8 -577.52,3559.8 -529.92,3607.4 JMP0.1@-432.6,3607.4 ; S5.1 -492.52,375.28 -420,447.8 R25.2 -350.31,817.6 -327.72,795 U5.3 -132.32,795 -67.52,859.8 -67.52,2249.8 -137.72,2320 P1.5 -477.72,2320 -522.52,2364.8 -522.52,2814.8 -442.4,2894.92 R24.1 R23.1 -442.4,3314.92 -430,3327.32 JMP0.1
  Bottom Layer w10: S5.4 S5.1
  Bottom Layer w30: v1(-3525.12,2617.4) -3525.12,2427.4 -3482.52,2384.8 -3060,2384.8 ; v1(-3060,2312.6) -3060,2384.8 ; v1(-2840,2312.6) -2840,2384.8 ; v1(-2372.52,2679.8) v1(-2372.52,2819.8) v1(-2372.52,2969.8) v1@-2372.52,3114.8 ; v1@-1795.52,2384.8 v1(-1893.05,2384.8) v1(-2369.52,2384.8) -2840,2384.8 ; -3060,2384.8 -2840,2384.8
  Bottom Layer w50: v1(-1102.52,3484.8) v1(-707.52,3484.8)
  other v1: -3280,2387.4 -2730,2387.4
VCC5V: C3.1 C4.1 C5.1 D01.1 D02.2 U2.3 U3.3 | length 1144.2
  Top Layer w40: C3.1@-3497.52,1759.8 C3.1 C4.1 -3372.52,1692.21 U3.3 -3254.52,1586.8 D01.1 -3162.52,1554.8 -3142.52,1534.8 -3142.52,1429.8 -3126.52,1413.8 -3067.72,1413.8 D02.2 ; C5.1@-3064.52,1255.37 D02.2 ; U2.3 -2961.97,1399.25 -2979.72,1417.01 D02.2
VCC12V: C1.1 C2.1 D01.2 P0.2 U3.1 | length 1223.7
  Top Layer w50: P0.2 C2.1 -3262.32,1065 -3235.12,1092.21 C1.1 D01.2@-3235.12,1404.41 ; U3.1 -3235.51,1404.8 D01.2@-3235.12,1404.41 ; D01.2 D01.2@-3235.12,1404.41
pads on no net: BT1.0 CON1.4 CON1.5 CON1.6 CON1.7 CON1.8 CON1.9 CON1.10 CON1.11 CON1.A CON1.B P6.3 P6.4 U1.2 U1.38 U6.1 U6.2 U6.3 U6.4 U6.5 U6.6 U6.7 U6.8 U6.11 U6.12 U6.14 U6.15 U6.16 U6.17 U6.18 U6.19 U6.22 U6.23 U6.24 U6.27 U6.28 U6.32 U6.34 U6.35 U6.38 U6.41 Y1.3
copper on no net:
  other v2: -3772.52,150.47 -150.47,150.47 -3772.52,3772.52 -150.47,3772.52

## Polygon pours and split planes (outlines as drawn)
GND on Top Layer "Keep-Out Layer-No Net" (solid, pour order 4): -3925,3925 0,3925 0,0 -3925,0
GND on Bottom Layer "Keep-Out Layer-No Net" (solid, pour order 6): -3925,3925 0,3925 0,0 -3925,0

## Keep-outs
Keep-Out Layer:
  rectangle: -3140,3574.8 -2470,3910
  lines w10: -3925,0 -3925,3925 0,3925 0,0 -3925,0 ; -2210,1810 -2210,2130 -1705,2130 -1705,1810 -2210,1810

## Silkscreen, mask and mechanical layers (free items; w line width, h text height)
Top Overlay:
  lines w10: -3490,465 -2665,465 -2665,1100 -3490,1100 -3490,465
  text "1" at -440,3680 h40
  text "BOOT0" at -305,3680 h40 r90
  text "GND" at -210,2700 h40
  text "NRST" at -210,2600 h40
  text "SWCLK" at -225,2495 h40
  text "SWDIO" at -225,2400 h40
  text "3V3" at -210,2295 h40
  text "RX" at -210,2120 h40
  text "TX" at -210,2020 h40
  text "GND" at -210,1920 h40
  text "1" at -60,1680 h40
  text "2" at -70,1575 h40
  text "3" at -70,1475 h40
  text "继电器" at -380,1435 h80 r90
  text "4" at -70,1380 h40
  text "土壤湿度传感器" at -3315,1010 h80
  text "GND" at -45,955 h40 r90
  text "12V" at -3720,890 h40
  text "PA0" at -3340,890 h40
  text "PA1" at -3065,890 h40
  text "PA2" at -2820,890 h40
  text "T" at -45,890 h40 r90
  text "3V3" at -45,735 h40 r90
  text "Intelligent Agriculture V1.3" at -1255,720 h60
  text "2015.12" at -810,620 h60
  text "GND" at -3350,520 h40
  text "GND" at -3090,520 h40
  text "GND" at -2835,520 h40
  text "GND" at -3720,510 h40
Bottom Overlay:
  text "UP" at -1920,1430 h50
  text "RIGTH" at -2340,935 h50
  text "OK" at -1915,935 h50
  text "LEFT" at -1380,935 h50
  text "DOWN" at -1865,445 h50
  text "SMART" at -3065,75 h50
  text "RETURN" at -2205,75 h50
  text "SET" at -1500,75 h50
  text "ON-OFF" at -580,75 h50

## Text inside footprints (layer, text, board x,y; h text height)
P6: Bottom Overlay "JLX12864G-1504-BN" at -2535,1905 h40; Bottom Overlay "K" at -1262.95,2045.63 h40; Bottom Overlay "A" at -2637.95,2050.63 h40